# Altium PCB PCB2.PcbDoc
Units mm, origin at the board's own origin, x right, y up, seen from the top; angles counter-clockwise.
Board outline 40 x 60.07 mm, 2 copper layers (Top Layer, Bottom Layer); 12 components, 9 nets, 70 pads, 0 vias.
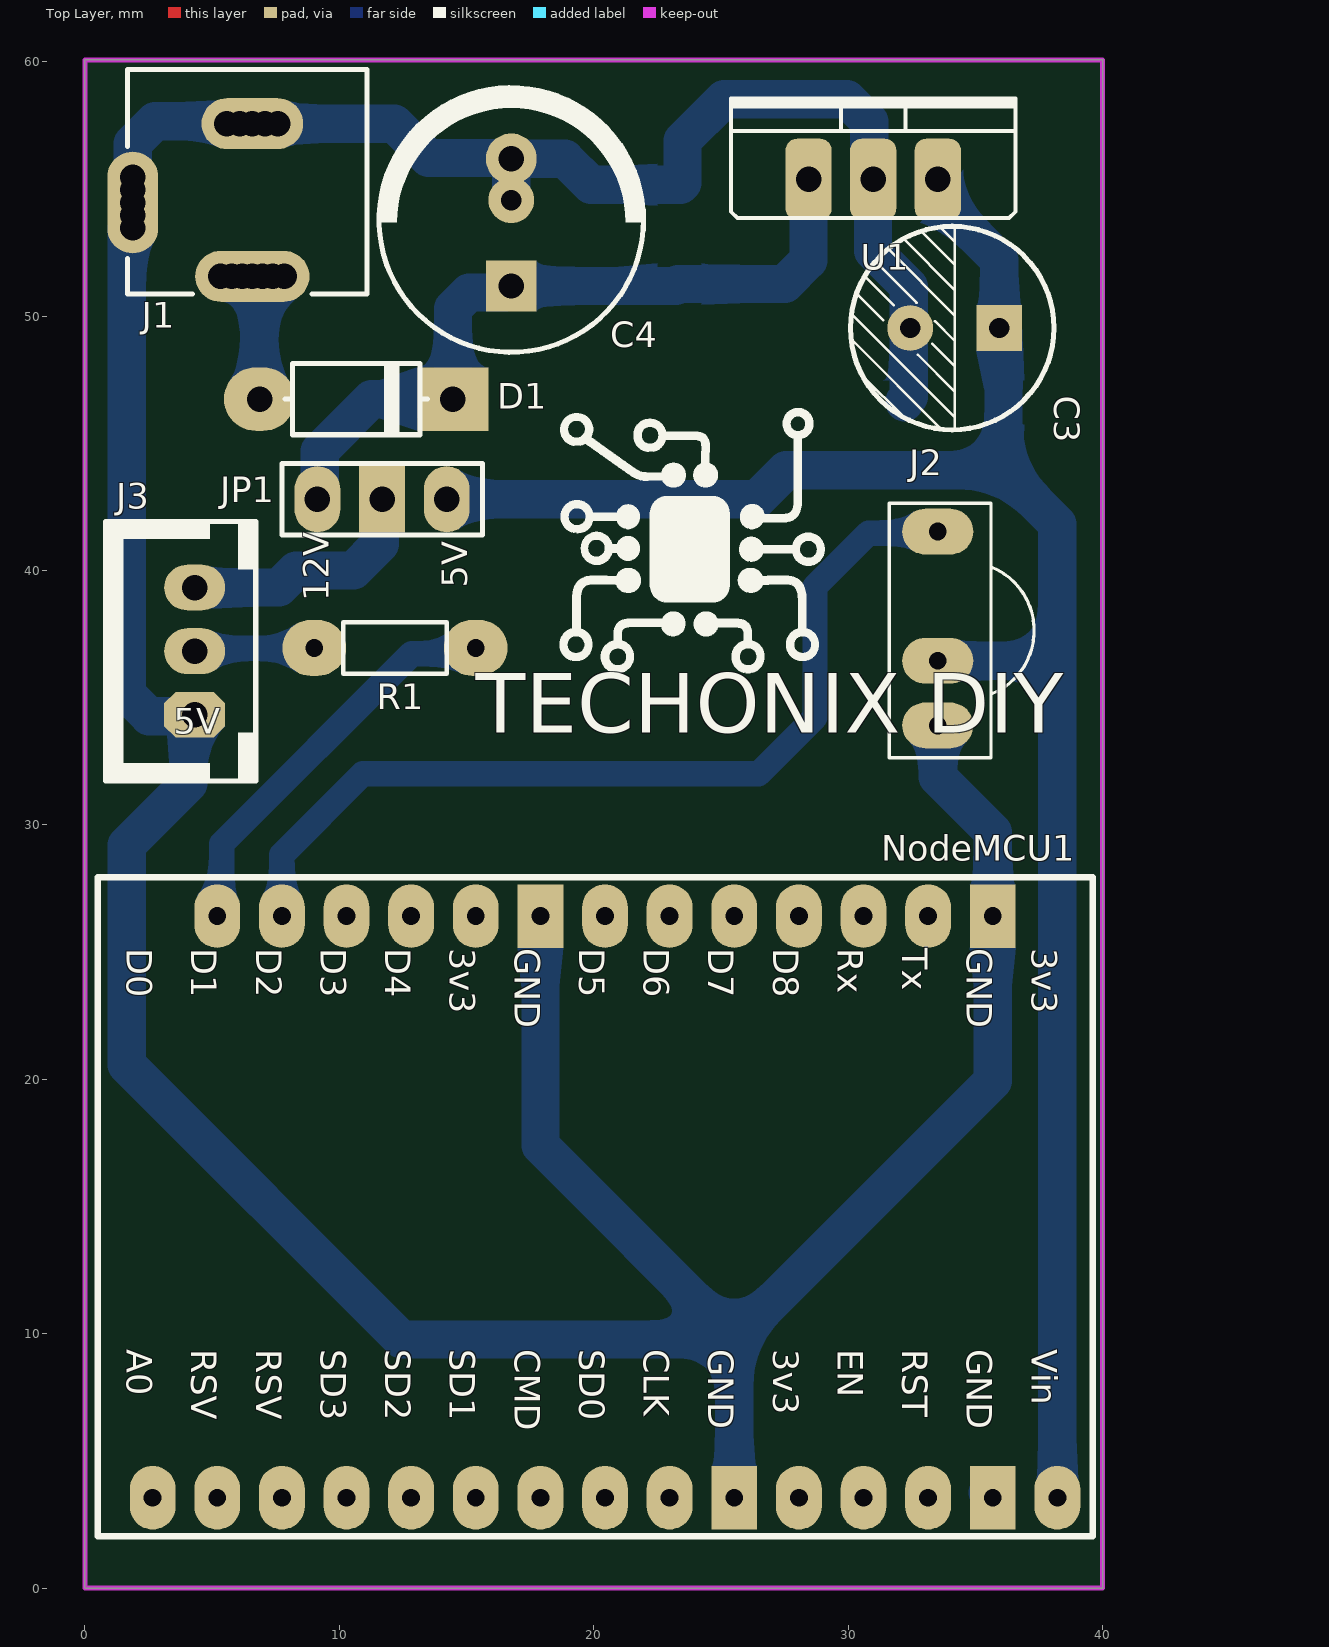
[diagram p0: Top Layer view]
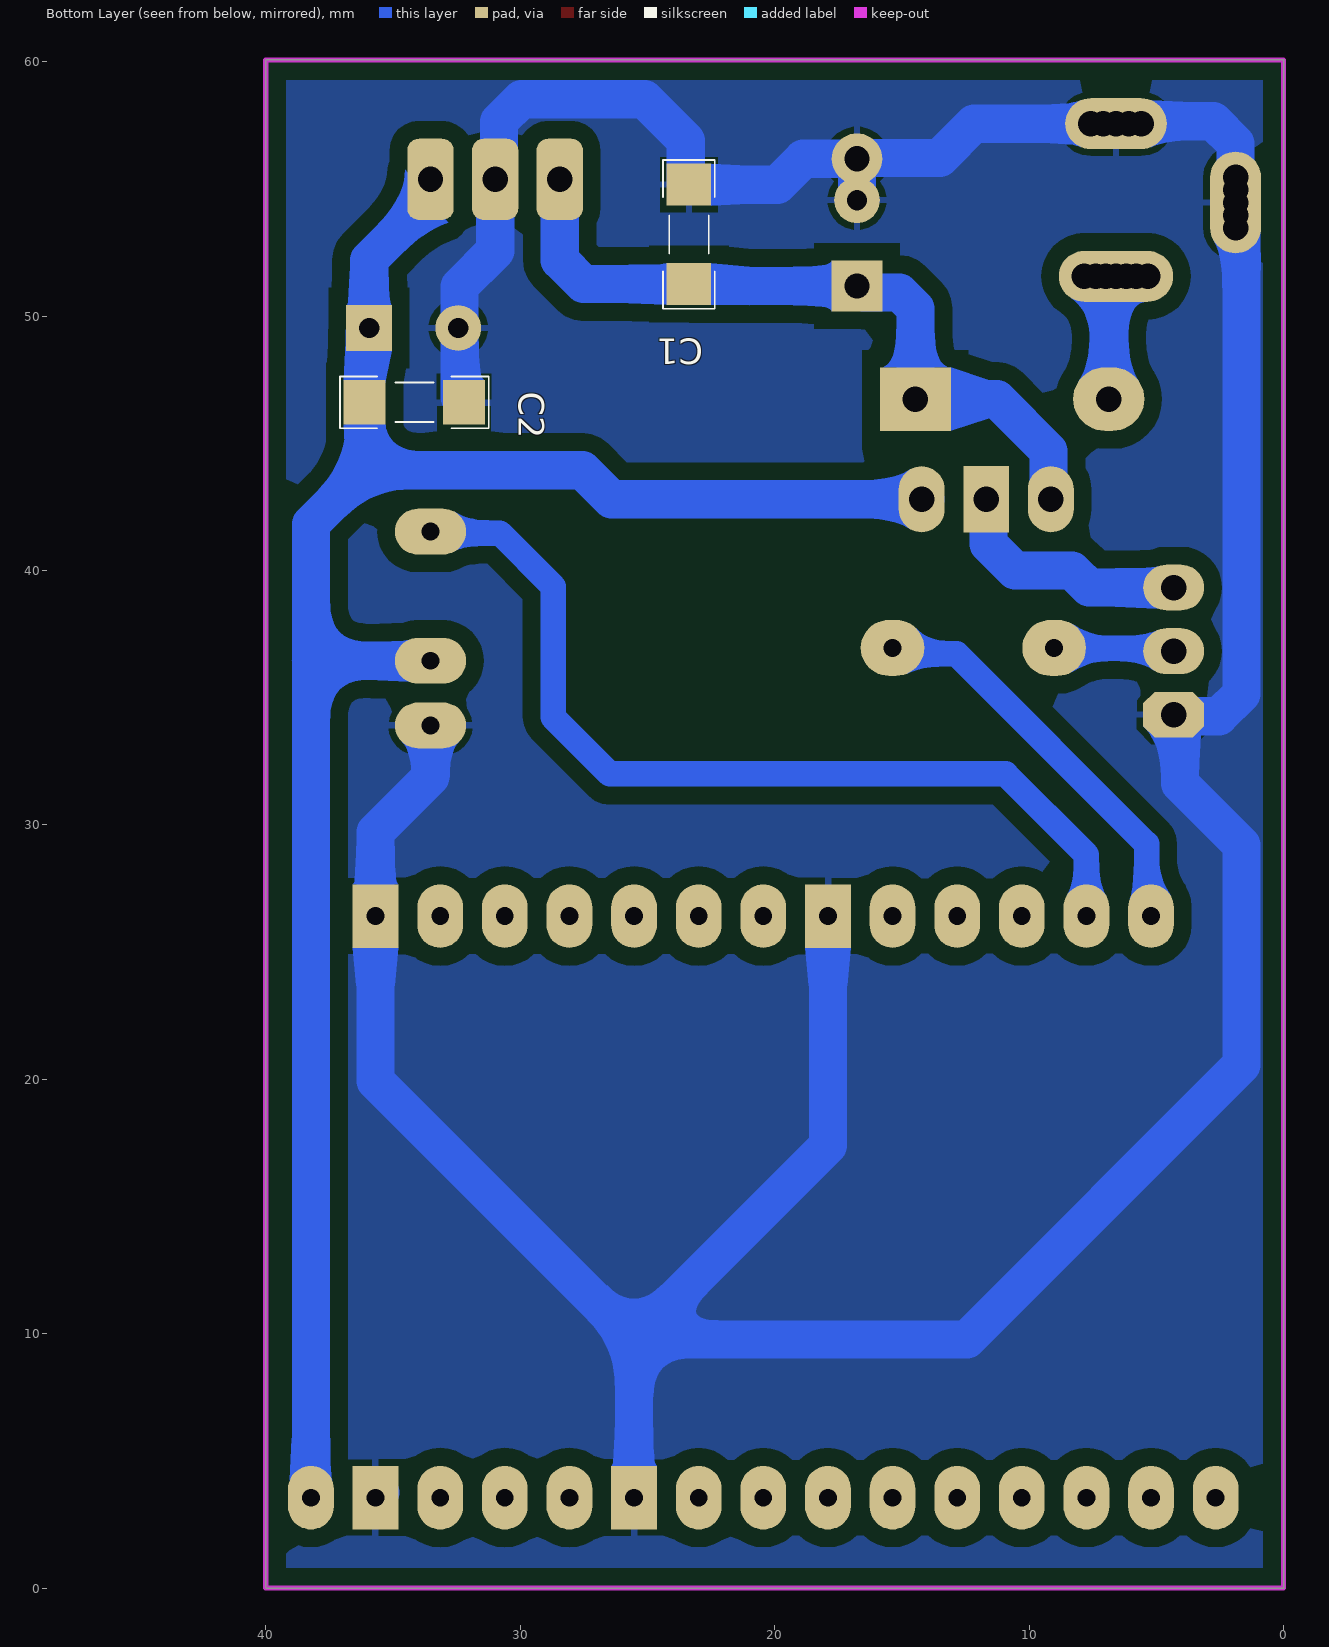
[diagram p1: Bottom Layer view, seen from below]
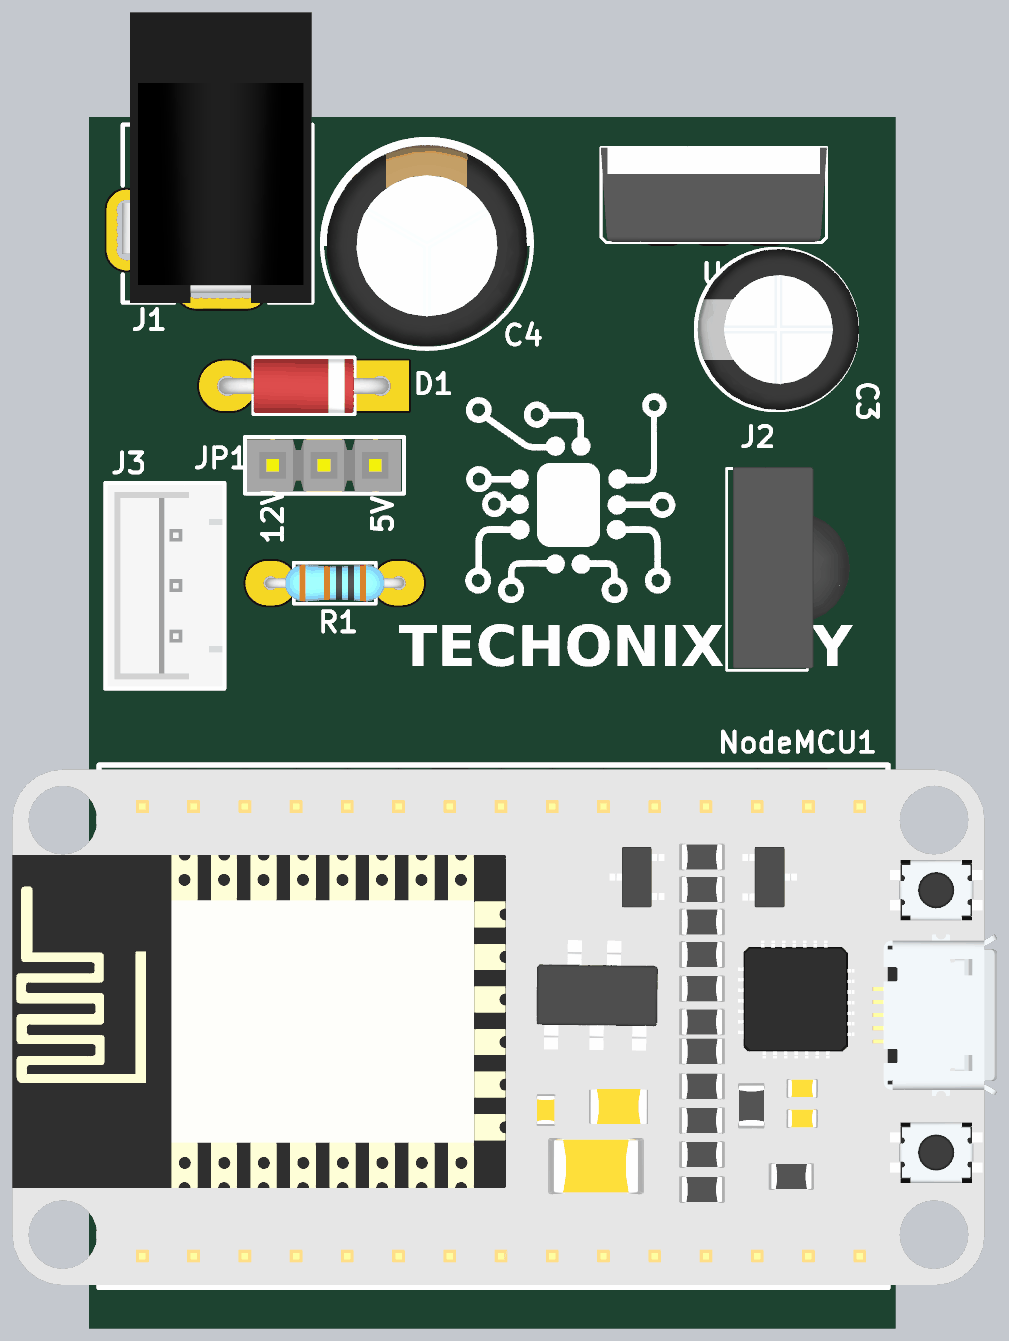
[diagram p2: 3D render of the assembled board from above, using the file's embedded part models]

## Layer stack, top to bottom
Top Solder: solder mask 0.0102, Solder Resist, Dk 3.5
Top Layer: signal copper 0.0356
Dielectric 1: dielectric 0.32, FR-4, Dk 4.8
Bottom Layer: signal copper 0.0356
Bottom Solder: solder mask 0.0102, Solder Resist, Dk 3.5

## Board outline
0,0 40.005,0 40.005,60.071 40,60.071 0,60.071

## Design rules (kind name [scope] priority, off if disabled: settings)
Clearance [All] p1: gap=0.7 ignorepadtopadclearanceinfootprint=FALSE
PolygonConnect [All] p1: connectstyle=Relief reliefconductorwidth=0.254 reliefentries=4 polygonreliefangle="90 Angle" airgapwidth=0.254
RoutingVias [All] p1: holewidth=0.711 width=1.27 viastyle="Through Hole" minholewidth=0.711 minwidth=1.27 maxholewidth=0.711 maxwidth=1.27
SolderMaskExpansion [All] p1: expansion=0.102 istentingtop=FALSE
SupplyNets "Schematic Supply Nets_3" [InNet('GND')] p1: voltage=0.000
SupplyNets "Schematic Supply Nets_2" [InNet('5V')] p2: voltage=0.000
SupplyNets "Schematic Supply Nets_1" [InNet('3V3')] p3: voltage=0.000
SupplyNets "Schematic Supply Nets" [InNet('12V')] p4: voltage=0.000
Width [All] p1: maxlimit=1.5 minlimit=0.5 preferedwidth=1
30 further rules are at their usual default settings.

## Classes and differential pairs
component class Sheet3: C1 C2 C3 C4 D1 J1 J3 JP1 NodeMCU1 R1 U1

## Components (designator, comment, footprint, x,y, rotation, side; value= is the part's Value field where it differs from the comment)
C1 "100nF" CAPC4817X12N 23.368,53.213 r270 bottom
C2 "100nF" CAPC4817X12N 34.163,46.609 r180 bottom
C3 "220u / 16V" "Cap electrolitic radial 8x12-3.5" 34.191,49.53 r180 top
C4 "100uF / 35V" "Cap electrolitic radial 10x20-5" 16.764,53.681 r90 top
D1 "1N4007" "DO41 P7.5MM" 10.668,46.736 r0 top
J1 "DC Power Jack" "DC Power Jack 1" 7.384,51.562 r270 top
J2 "TSOP1738" TSOP17XX 33.528,37.719 r90 top
J3 "XH_3" XH_3 4.318,36.83 r90 top
JP1 "Jumper" "jumper selector" 14.224,42.799 r180 top
NodeMCU1 "NodeMCU DevKit v1.0" NODEMCU 1.067,29.083 r270 top
R1 "220R" Res-(1/4) 12.192,36.957 r180 top
U1 "L7805" to220-123-v 28.448,55.372 r0 top

## Footprints (in the part's own frame and the unit in brackets; to place one, negate y for a bottom-side part, rotate by r counter-clockwise, add the part's x,y. Pads: shape width x height; smd on the part's side, far side on the other; paste and mask are expansions set on the pad)
"Cap electrolitic radial 8x12-3.5" [mm] "Cap electrolitic radial 8x12-3.5-Design:Abbas Basereh"
  rect 1.8x1.8 hole 0.8: 1(-1.75,0)
  round 1.8 hole 0.8: 2(1.75,0)
  silkscreen extent -3.9,-4 4.1,4, body extent -4,-4 4,4, height 12.3
"Cap electrolitic radial 10x20-5" [mm] "Cap electrolitic radial 10x20-5-Design:Abbas Basereh"
  rect 2x2 hole 1: 1(-2.5,0)
  round 1.8 hole 0.8: 2(0.875,0)
  round 2 hole 1: 2(2.5,0)
  silkscreen extent -5.1,-5.2 5.3,5.2, body extent -5,-5 5,5, height 20
CAPC4817X12N [mm] "Chip Capacitor, 2-Leads, Body 4/80x1/70mm, IPC Medium Density-Design:Abbas Basereh"
  rect 1.65x1.75 smd: 1(-1.95,0) 2(1.95,0)
  silkscreen extent -2.92,-1.02 2.92,1.02, body extent -1.6,-0.8 1.6,0.8, height 1
"DC Power Jack 1" [mm] "Power Adaptor Jack"
  round 1.5 hole 1: 1(0,0.45) 1(0,0) 1(0,-0.4) 1(0,-1.2) 1(0,-1.6) 1(0,-2.05) 2(-6,-1.8) 2(-6,0.2) 2(-6,-1.3) 2(-6,-0.3) 3(-3.9,-5.5) 3(-3.4,-5.5) 3(-2.4,-5.5) 3(-1.9,-5.5)
  oval 2x4.5 hole 1: 1(0,-0.8)
  oval 2x4 hole 1: 2(-6,-0.8)
  oval 4x2 hole 1: 3(-2.9,-5.5)
  silkscreen extent -8.13,-5.7 0.7,3.7, body extent -13.68,-5.74 0.72,3.66, height 11.05
"DO41 P7.5MM" [mm] "1N4007"
  oval 2.8x2.5 hole 1: 1(-3.8,0)
  rect 2.8x2.5 hole 1: 2(3.8,0)
  silkscreen extent -2.8,-1.4 2.8,1.4, body extent -4.22,-1.33 4.19,1.33, height 3.03
"jumper selector" [mm]
  oval 1.8x2.6 hole 1: 1(0,0) 3(5.08,0)
  rect 1.8x2.6 hole 1: 2(2.54,0)
  silkscreen extent -1.4,-1.4 6.48,1.4, body extent -1.24,-1.27 6.38,1.27, height 10.16
NODEMCU [mm]
  rect 2.5x1.8 hole 0.7: 2(2.667,34.62) 9(2.667,16.84) 25(25.527,24.46) 29(25.527,34.62)
  oval 2.5x1.8 hole 0.7: 3(2.667,32.08) 4(2.667,29.54) 5(2.667,27) 6(2.667,24.46) 7(2.667,21.92) 8(2.667,19.38) 10(2.667,14.3) 11(2.667,11.76) 12(2.667,9.22) 13(2.667,6.68) 14(2.667,4.14) 16(25.527,1.6) 17(25.527,4.14) 18(25.527,6.68) 19(25.527,9.22) 20(25.527,11.76) 21(25.527,14.3) 22(25.527,16.84) 23(25.527,19.38) 24(25.527,21.92) 26(25.527,27) 27(25.527,29.54) 28(25.527,32.08) 30(25.527,37.16)
  silkscreen extent 1.14,-0.56 27.05,38.56, body extent 1.37,-4.85 26.92,43.97, height 7.85
Res-(1/4) [mm]
  oval 2.5x2.2 hole 0.7: 1(-3.175,0) 2(3.175,0)
  silkscreen extent -2.03,-1.02 2.03,1.02, body extent -3.43,-0.93 3.43,0.91, height 2.92
to220-123-v [mm] "TO220 123 pin numbering Vertical mount"
  rrect50% 1.82x3.2 hole 1: 1(0,0) 2(2.54,0) 3(5.08,0)
  silkscreen extent -3.05,-1.52 8.13,3.17, body extent -3.07,-1.49 8.15,3.2, height 24
TSOP17XX [mm]
  oval 1.8x2.8 hole 0.7: GND(-3.81,0) OUT(3.81,0) V+(-1.27,0)
  silkscreen extent -5.08,-3.78 4.92,1.91, body extent -5,-4.2 5,1.6, height 31.1
XH_3 [mm] "PW10-x-M, JST-BxB-XH-A pitch: 2.5mm, 3A/250v"
  oct 1.8x2.4 hole 1: 1(-2.5,0)
  oval 1.8x2.4 hole 1: 2(0,0) 3(2.5,0)
  silkscreen extent -5.1,-2.4 5.1,3.5, body extent -5,-2.3 5,3.4, height 7

## Part data
C1 C2: library part "CAP SMD 1206", "CAP 1206", Data=16-12-2016, Desc.="CAP SMD 1206", designer="Abbas Basereh"
C3 C4: library part "Cap ELECTROLITIC TOTAL SIZE", "Cap electrolitic radial", Data=16-12-2016, designer="Abbas Basereh"
D1: library part "1N4007 (THD)", "Diode Standard 1000V 1A Through Hole DO-204AL (DO-41)", PartNumber=1N4007
J1: "DC Power Jack. Center Pin 2.5mm. Diameter: 5.7mm", Adding Date=10/21/2009, Company=Personal, designer="Ali Hafizi", Project Name=Laser
J2: "IR Remote Receiver 38KHz 35m 3-Pin", Package="DIP-3 Vishay", Availability="Not in stock", Check_prices=https://www.snapeda.com/parts/TSOP1738./Vishay/view-part/?ref=eda, MF=Vishay, MP=TSOP1738., Price=None, SnapEDA_Link=https://www.snapeda.com/parts/TSOP1738./Vishay/view-part/?ref=snap
J3: "PW10-x-M, JST-BxB-XH-A pitch: 2.5mm, 3A/250v", MANF=JST, MANF_P#=B3B-XH-A, PARAM=3.0A, PARAM2=250v
JP1: library part "Jumper Selector", "Jumper Selector"
R1: library part Resistor, "Resistor", Power="1/4 W", Tolerance=5%
U1: library part L7805-TO220, "LINEAR REGULATOR 5.0V", Supplier Part Number 1=511-L7805ACP, Supplier 1=Mouser

## Nets (pads, with @x,y where several pads share a name; then routed paths per layer and width w, separated by ;. In a path a pad name is that pad's centre, name@x,y a point inside that pad or via, vN(x,y) a via of type N, cw(c..) or ccw(c..) an arc to the next point about the centre after c; other vN are vias at no path point)
3V3: NodeMCU1.10
5V: C2.1 C3.1 J2.V+ JP1.1 NodeMCU1.30 U1.3 | length 81
  Bottom Layer w1.5: JP1.1@14.081,42.799 JP1.1 26.416,42.799 27.559,43.942 36.113,43.942 ; J2.V+ 38.225,36.449 ; U1.3 33.778,55.122 33.778,54.372 35.941,52.209 C3.1 36.113,49.358 C2.1 36.113,43.942 ; NodeMCU1.30@38.225,3.558 38.225,36.449 ; 36.113,43.942 38.225,41.83 38.225,36.449
12V: C1.2 C4.1 D1.2 JP1.3 U1.1 | length 29.8
  Bottom Layer w1.5: JP1.3 9.234,42.889 9.234,44.7 11.27,46.736 D1.2 ; D1.2@14.468,46.486 14.468,50.302 15.097,50.931 16.514,50.931 C4.1 23.236,51.181 23.318,51.263 C1.2 27.514,51.263 28.448,52.197 U1.1
DATA: NodeMCU1.14 R1.1 | length 16.1
  Bottom Layer w1: NodeMCU1.14 5.379,26.588 5.379,29.255 12.851,36.727 15.137,36.727 R1.1
DATA_OUT: J3.2 R1.2 | length 5
  Bottom Layer w1: J3.2@4.07,36.911 4.064,36.917 4.084,36.937 8.997,36.937 R1.2
GND: C1.1 C2.2 C3.2 C4.2 J1.2 J1.3 J2.GND J3.1 NodeMCU1.2 NodeMCU1.9 NodeMCU1.25 NodeMCU1.29 U1.2 | length 168.7
  Bottom Layer w1.5: J1.3@1.651,53.462 1.651,35.152 2.53,34.274 J3.1@4.064,34.274 ; J1.3@1.884,53.462 1.884,53.962 1.884,54.462 1.884,54.962 1.884,55.462 1.884,56.779 2.763,57.658 5.584,57.658 6.362,57.658 J1.2@6.458,57.562 ; J3.1 4.262,34.274 J3.1@4.064,34.274 ; J1.2@7.458,57.562 12.161,57.562 13.514,56.209 16.736,56.209 C4.2@16.764,56.181 ; C4.2@16.764,54.556 C4.2@16.764,56.181 ; NodeMCU1.9 17.907,17.399 25.527,9.779 ; NodeMCU1.25 25.527,9.779 ; C2.2 32.213,46.659 32.384,46.83 32.384,49.473 C3.2 32.384,49.587 32.384,51.167 30.983,52.568 30.983,55.367 30.833,55.517 30.833,57.642 29.954,58.521 25.12,58.521 23.493,56.894 23.493,55.238 23.418,55.163 C1.1 19.894,55.163 18.876,56.181 C4.2@16.764,56.181 ; J2.GND 33.528,31.877 35.687,29.718 35.687,19.939 25.527,9.779 ; NodeMCU1.29@35.487,3.756 NodeMCU1.29 ; J3.1@4.064,34.274 4.064,31.623 1.651,29.21 1.651,20.574 12.446,9.779 25.527,9.779
IR: J2.OUT NodeMCU1.13 | length 36.5
  Bottom Layer w1: NodeMCU1.13 7.747,28.829 10.922,32.004 26.48,32.004 28.702,34.226 28.702,39.37 30.803,41.471 33.47,41.471 J2.OUT
NetD1_1: D1.1 J1.1 | length 4.8
  Bottom Layer w1.5: J1.1@6.858,51.562 6.858,46.746 D1.1
NetJ3_3: J3.3 JP1.2 | length 9.8
  Bottom Layer w1.5: J3.3 7.634,39.33 8.309,40.005 10.555,40.005 11.594,41.044 11.594,42.709 JP1.2
pads on no net: NodeMCU1.3 NodeMCU1.4 NodeMCU1.5 NodeMCU1.6 NodeMCU1.7 NodeMCU1.8 NodeMCU1.11 NodeMCU1.12 NodeMCU1.16 NodeMCU1.17 NodeMCU1.18 NodeMCU1.19 NodeMCU1.20 NodeMCU1.21 NodeMCU1.22 NodeMCU1.23 NodeMCU1.24 NodeMCU1.26 NodeMCU1.27 NodeMCU1.28

## Polygon pours and split planes (outlines as drawn)
GND on Bottom Layer "GND_L02_P000" (solid, remove dead copper, pour order 0): 0,60.071 50,60.071 50,0 0,0

## Keep-outs
Keep-Out Layer:
  lines w0.2: 40,0 0,0 0,60.071 40,60.071 ; 40.005,0 40.005,60.071

## Silkscreen, mask and mechanical layers (free items; w line width, h text height)
Top Overlay:
  drawing of 11 lines, arcs and shapes, not listed
  text "5V" at 15.04,39.316 h1 r90
  text "12V" at 9.589,38.798 h1 r90
  text "5V" at 3.492,33.591 h1
  text "TECHONIX DIY" at 15.367,32.854 h4

## Text inside footprints (layer, text, board x,y; h text height)
NodeMCU1: Top Overlay "EN" at 29.591,9.398 h1 r270; Top Overlay "D2" at 6.731,25.146 h1 r270; Top Overlay "SD3" at 9.271,9.398 h1 r270; Top Overlay "D6" at 21.971,25.146 h1 r270; Top Overlay "3v3" at 14.351,25.146 h1 r270; Top Overlay "D1" at 4.191,25.146 h1 r270; Top Overlay "RST" at 32.131,9.398 h1 r270; Top Overlay "Tx" at 32.131,25.146 h1 r270; Top Overlay "SD0" at 19.431,9.398 h1 r270; Top Overlay "GND" at 34.671,9.398 h1 r270; Top Overlay "GND" at 16.891,25.146 h1 r270; Top Overlay "GND" at 34.671,25.146 h1 r270; Top Overlay "D8" at 27.051,25.146 h1 r270; Top Overlay "A0" at 1.651,9.398 h1 r270; Top Overlay "D3" at 9.271,25.146 h1 r270; Top Overlay "RSV" at 4.191,9.398 h1 r270; Top Overlay "SD2" at 11.811,9.398 h1 r270; Top Overlay "3v3" at 27.051,9.398 h1 r270; Top Overlay "D5" at 19.431,25.146 h1 r270; Top Overlay "3v3" at 37.211,25.146 h1 r270; Top Overlay "Rx" at 29.591,25.146 h1 r270; Top Overlay "Vin" at 37.211,9.398 h1 r270; Top Overlay "CLK" at 21.971,9.398 h1 r270; Top Overlay "GND" at 24.511,9.398 h1 r270; Top Overlay "RSV" at 6.731,9.398 h1 r270; Top Overlay "D7" at 24.511,25.146 h1 r270; Top Overlay "SD1" at 14.351,9.398 h1 r270; Top Overlay "D0" at 1.651,25.146 h1 r270; Top Overlay "CMD" at 16.891,9.398 h1 r270; Top Overlay "D4" at 11.811,25.146 h1 r270